# EAGLE board untitled (EAGLE 9.6.2)
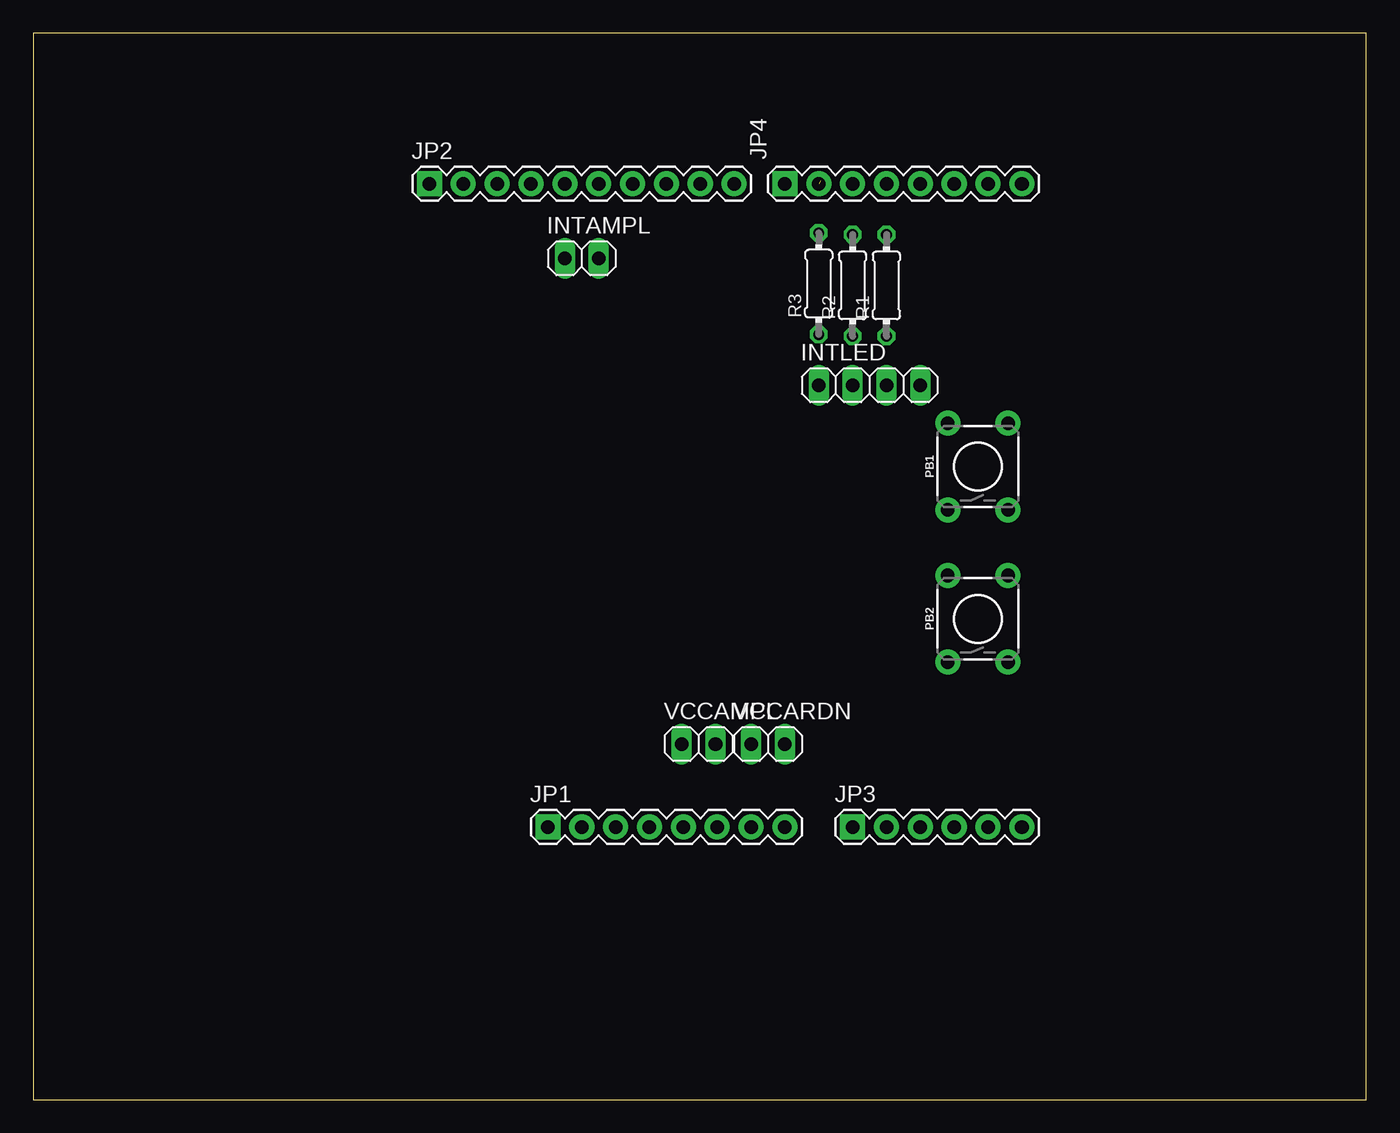
[diagram p0: board, top side]
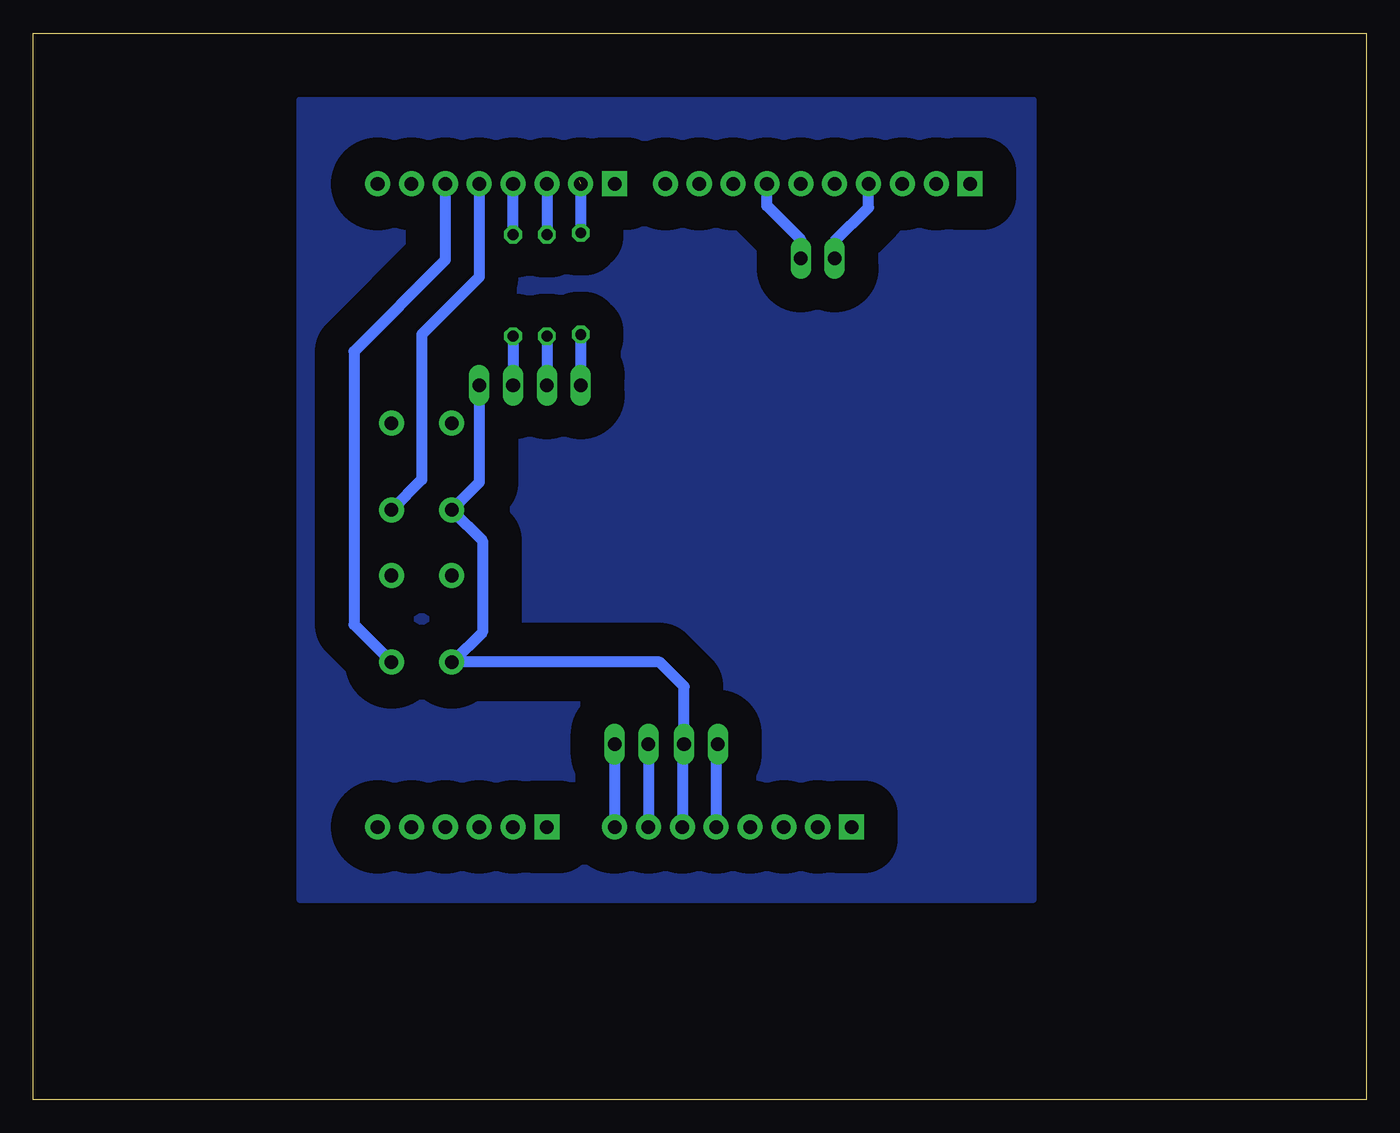
[diagram p1: board, bottom side, seen from below]

Size 100 x 80 mm. Coordinates in mm from the lower left corner, seen from the top.
Outline: 0,0 100,0 100,80 0,80 0,0
Copper layers (1*16): Top 0.035mm / dielectric 1.5mm / Bottom 0.035mm
Design rules "default": minimum track width 6mil, minimum drill 0.35mm, track to track 6mil, track to pad 6mil, pad to pad 6mil, via to via 6mil, smd to smd 6mil, copper to edge 40mil, drill to drill 6mil, minimum pad ring 10mil, minimum via ring 8mil, stop-mask expansion 4mil, vias tented up to drill 0mil, thermal gap 10mil

## Footprints (pad centres in the part's own frame; a part is rotated, then mirrored left to right if it is on the bottom)
1X02 = drill 1.016 long: 1 -1.27,0; 2 1.27,0
1X04 = drill 1.016 long: 1 -3.81,0; 2 -1.27,0; 3 1.27,0; 4 3.81,0
CONN-1X08 = drill 1.016 pad 1.88 square: 1 0,0 | drill 1.016 pad 1.88: 2 2.54,0; 3 5.08,0; 4 7.62,0; 5 10.16,0; 6 12.7,0; 7 15.24,0; 8 17.78,0
CONN-1X10 = drill 1.016 pad 1.88 square: 1 0,0 | drill 1.016 pad 1.88: 2 2.54,0; 3 5.08,0; 4 7.62,0; 5 10.16,0; 6 12.7,0; 7 15.24,0; 8 17.78,0; 9 20.32,0; 10 22.86,0
CONN-1X06 = drill 1.016 pad 1.88 square: 1 0,0 | drill 1.016 pad 1.88: 2 2.54,0; 3 5.08,0; 4 7.62,0; 5 10.16,0; 6 12.7,0
TACTILE_SWITCH_PTH_6.0MM = drill 1.016 pad 1.88: 1 -3.251,2.261; 2 3.251,2.261; 3 -3.251,-2.261; 4 3.251,-2.261
0204/7 = drill 0.813 octagon: 1 -3.81,0; 2 3.81,0

## Placement (x,y rotation side)
INTAMPL  [1X02]  41.15,63.12 0 top
INTLED  [1X04]  62.74,53.59 0 top
JP1  [CONN-1X08]  38.61,20.45 0 top
JP2  ARDUINO_CONN-IO_HSIP  [CONN-1X10]  29.72,68.71 0 top
JP3  [CONN-1X06]  61.47,20.45 0 top
JP4  [CONN-1X08]  56.39,68.71 0 top
PB1  [TACTILE_SWITCH_PTH_6.0MM]  70.87,47.5 90 top
PB2  [TACTILE_SWITCH_PTH_6.0MM]  70.87,36.07 90 top
R1  [0204/7]  64.01,61.09 90 top
R2  [0204/7]  61.47,61.09 90 top
R3  [0204/7]  58.93,61.21 90 top
VCCAMPL  [1X02]  49.91,26.67 0 top
VCCARDN  [1X02]  55.12,26.67 0 top

## Library data of the parts
INTAMPL INTLED VCCAMPL VCCARDN = pinhead
JP1-JP4 = arduino_jw
PB1 PB2 = SparkFun-Switches; PROD_ID: SWCH-08441; SF_SKU: COM-00097
R1-R3 = rcl; SPICEPREFIX: R

## Nets
N$1: INTAMPL.2 JP2.7
N$2: INTAMPL.1 JP2.4
N$3: JP1.8 VCCARDN.2
N$4: JP1.7 VCCARDN.1
N$5: INTLED.4 JP1.6 PB1.1 PB2.1 VCCAMPL.2
N$6: JP1.5 VCCAMPL.1
N$7: JP4.5 PB1.3
N$8: JP4.6 PB2.3
N$9: JP4.2 R3.2
N$10: INTLED.2 R2.1
N$11: INTLED.3 R1.1
N$12: JP4.4 R1.2
N$13: JP4.3 R2.2
N$14: INTLED.1 R3.1

## Tracks (layer width: path | path; a pad name or v marks a point on that pad's centre or on a via)
GND
  pour Bottom (isolate 2.54): 25,70 25,15 55,15 80,15 80,50 80,75 30,75 25,75
N$1
  Bottom 0.813: INTAMPL.2 42.42,64.52 44.96,67.06 JP2.7
N$2
  Bottom 0.813: INTAMPL.1 39.88,64.39 37.34,66.93 JP2.4
N$3
  Bottom 0.813: VCCARDN.2 JP1.8
N$4
  Bottom 0.813: VCCARDN.1 JP1.7
N$5
  Bottom 0.813: JP1.6 51.31,26.54 VCCAMPL.2 51.18,30.99 53.01,32.82 PB2.1 68.53,32.82 66.29,35.05 66.29,41.94 PB1.1 66.55,46.3 INTLED.4
N$6
  Bottom 0.813: VCCAMPL.1 48.77,26.54 JP1.5
N$7
  Bottom 0.813: JP4.5 66.55,61.72 70.87,57.4 70.87,46.51 PB1.3
N$8
  Bottom 0.813: 69.09,67.56 JP4.6 69.09,62.99 75.95,56.13 75.95,35.64 PB2.3
N$9  (1 unrouted)
  Bottom 0.813: 59.05,68.96 58.93,68.83 R3.2
N$10
  Bottom 0.813: R2.1 INTLED.2
N$11
  Bottom 0.813: R1.1 INTLED.3
N$12
  Bottom 0.813: 64.14,65.02 R1.2 JP4.4
N$13
  Bottom 0.813: 61.59,68.83 JP4.3 R2.2
N$14
  Bottom 0.813: R3.1 INTLED.1